# Altium PCB PCB1 (1).PcbDoc
Units mil, origin at the board's own origin, x right, y up, seen from the top; angles counter-clockwise.
Board outline 6000 x 4000 mil, 2 copper layers (Top Layer, Bottom Layer); 31 components, 20 nets, 81 pads, 0 vias.
Unrouted connection lines stored in the file: 59.
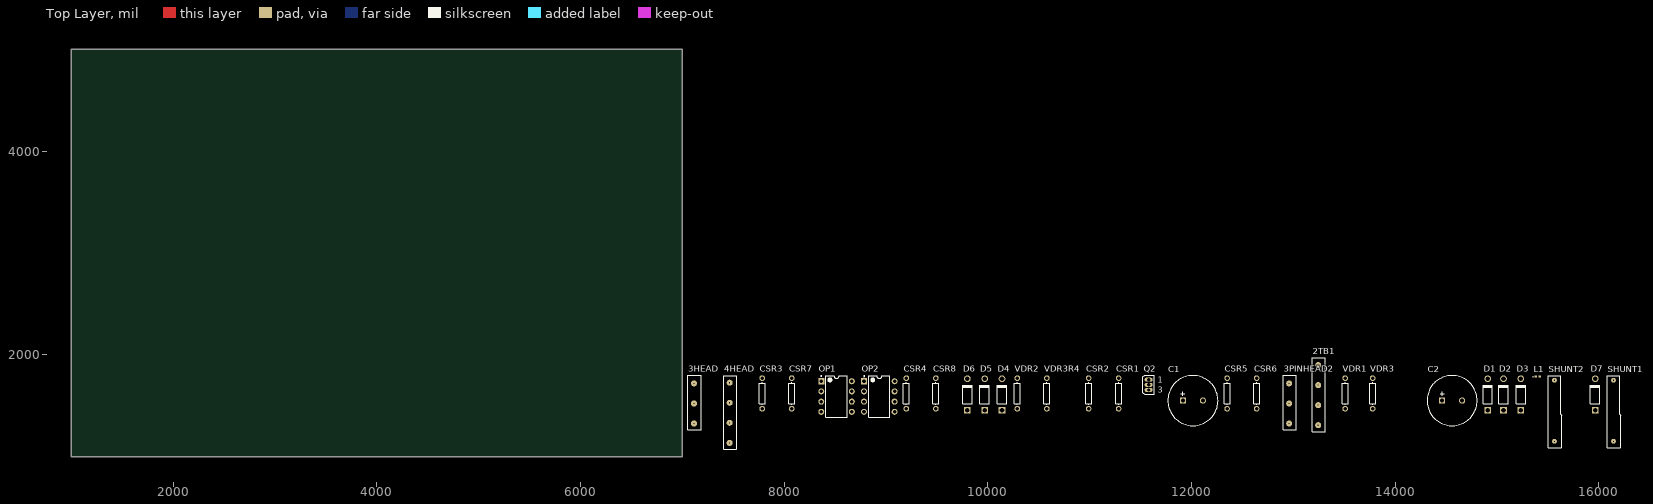
[diagram p0: Top Layer view]
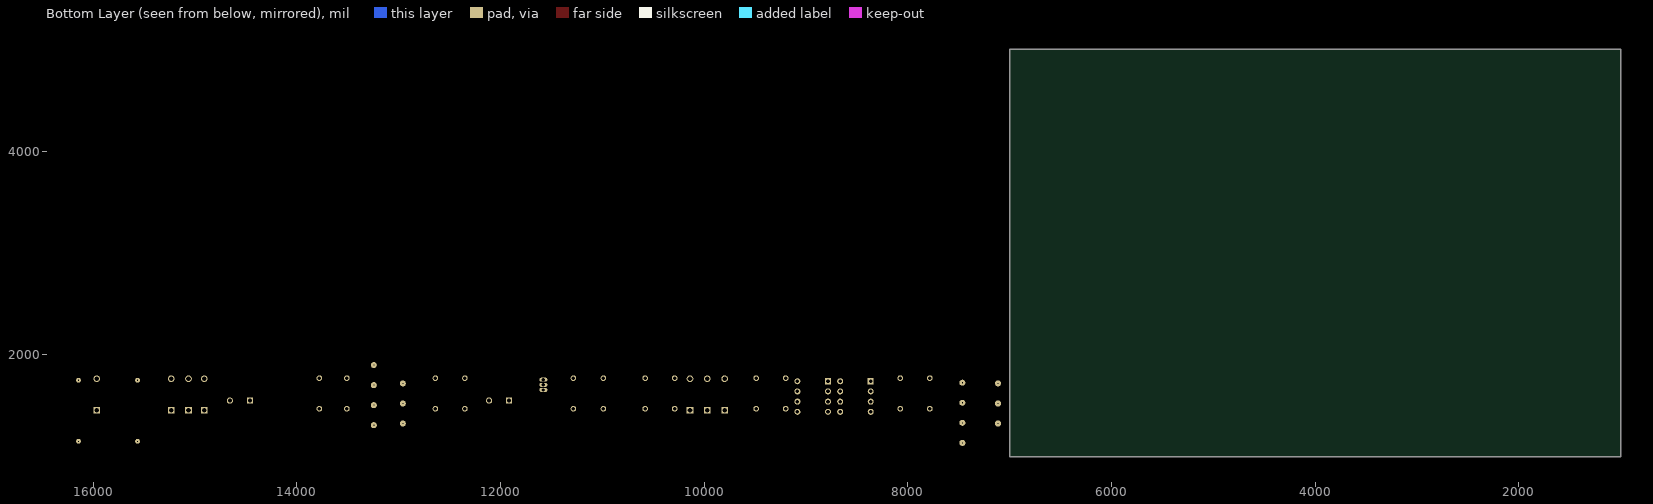
[diagram p1: Bottom Layer view, seen from below]

## Layer stack, top to bottom
Top Solder: solder mask 0.4, Solder Resist, Dk 3.5
Top Layer: signal copper 1.4
Dielectric 1: dielectric 12.6, FR-4, Dk 4.8
Bottom Layer: signal copper 1.4
Bottom Solder: solder mask 0.4, Solder Resist, Dk 3.5

## Board outline
1000,1000 7000,1000 7000,5000 1000,5000

## Design rules (kind name [scope] priority, off if disabled: settings)
Clearance [All] p1: gap=10 ignorepadtopadclearanceinfootprint=FALSE except(0: Arc-Hole Track-Hole SMDPad-Hole THPad-Hole Via-Hole Fill-Hole Poly-Hole Region-Hole Text-Hole)
PolygonConnect [All] p1: connectstyle=Relief reliefconductorwidth=10 reliefentries=4 polygonreliefangle="90 Angle" airgapwidth=10
RoomDefinition _1PCB_Shematic [InComponentClass('_1PCB_Shematic')] p1: confinementstyle=ConfineIn formatcopy=TRUE lockcomponents=FALSE outline 7045,1060 16430,1060 16430,1910 7045,1910
RoutingVias [All] p1: holewidth=28 width=50 viastyle="Through Hole" minholewidth=28 minwidth=50 maxholewidth=28 maxwidth=50
SolderMaskExpansion [All] p1: expansion=4
Width [All] p1: maxlimit=10 minlimit=10 preferedwidth=10
30 further rules are at their usual default settings.

## Components (designator, comment, footprint, x,y, rotation, side; value= is the part's Value field where it differs from the comment)
2TB1 "2PINTERMINAL" "4 PIN HEADER" 13245,1308.15 r90 top
3HEAD "3 PIN HEADER" "3 PIN HEADER" 7115,1325 r90 top
3PINHEAD2 "3 PIN HEADER" "3 PIN HEADER" 12960,1325 r90 top
4HEAD "4 PIN HEADER" "4 PIN HEADER" 7465,1135 r90 top
C1 "200uF" NIC-UHE-12.5x31.5-2_V 12015,1550 r0 top
C2 "GENERIC 100uF" NIC-UHE-12.5x31.5-2_V 14560,1550 r0 top
CSR1 "CSR_R1" AXIAL-0.3 11285,1620 r90 top value=1k
CSR2 "CSR_R1" AXIAL-0.3 10990,1620 r90 top value=1k
CSR3 "CSR_R2" AXIAL-0.3 7785,1620 r90 top value=100k
CSR4 "CSR_R2" AXIAL-0.3 9200,1620 r90 top value=100k
CSR5 "CSR_R1" AXIAL-0.3 12350,1620 r90 top value=1k
CSR6 "CSR_R1" AXIAL-0.3 12640,1620 r90 top value=1k
CSR7 "CSR_R2" AXIAL-0.3 8075,1620 r90 top value=100k
CSR8 "CSR_R2" AXIAL-0.3 9490,1620 r90 top value=100k
D1 "1N5817-T" DIOD-DO-41-P-2 14910,1610 r90 top
D2 "1N5817-T" DIOD-DO-41-P-2 15065,1610 r90 top
D3 "1N5817-T" DIOD-DO-41-P-2 15235,1610 r90 top
D4 "1N5817-T" DIOD-DO-41-P-2 10140,1610 r90 top
D5 "1N5817-T" DIOD-DO-41-P-2 9970,1610 r90 top
D6 "1N5817-T" DIOD-DO-41-P-2 9800,1610 r90 top
D7 "1N5817-T" DIOD-DO-41-P-2 15965,1610 r90 top
L1 "" 0402-A 15400,1785 r0 top value=1mH
OP1 "LM358AN" N08E 8515,1590 r0 top
OP2 "LM358AN" N08E 8935,1590 r0 top
Q2 "MOSFET-N" E3 11580,1705 r0 top
SHUNT1 "SH. RESISTOR" SHUNT15.24 16145,1150 r90 top
SHUNT2 "SH. RESISTOR" SHUNT15.24 15565,1150 r90 top
VDR1 "V_DIVA1" AXIAL-0.3 13510,1620 r90 top value=200k
VDR2 "V_DIVB2" AXIAL-0.3 10290,1620 r90 top value=100k
VDR3 "V_DIVA2" AXIAL-0.3 13780,1620 r90 top value=200k
VDR3R4 "V_DIVB2" AXIAL-0.3 10580,1620 r90 top value=100k

## Footprints (in the part's own frame and the unit in brackets; to place one, negate y for a bottom-side part, rotate by r counter-clockwise, add the part's x,y. Pads: shape width x height; smd on the part's side, far side on the other; paste and mask are expansions set on the pad)
"3 PIN HEADER" [mm] "3 PIN HEADER"
  round 1.5 hole 0.15: 1(0,0) 2(5,0) 3(10,0)
  silkscreen extent -1.6,-1.8 12,1.5
"4 PIN HEADER" [mm] "4 PIN HEADER"
  round 1.5 hole 0.15: 1(0,0) 2(5,0) 3(10,0) 4(15,0)
  silkscreen extent -1.6,-1.8 16.8,1.5
0402-A [mm] "Chip Inductor, Body 1.0x0.5mm, IPC High Density"
  rect 0.6x0.5 smd: 1(-0.5,0) 2(0.5,0)
  silkscreen extent -1.1,-0.15 -1.1,0.15, body extent -0.55,-0.3 0.55,0.3, height 0.55
AXIAL-0.3 [mm] "Axial Device, Thru-Hole; 2 Leads; 0.3 in Pin Spacing"
  round 1.4 hole 0.85: 1(-3.81,0) 2(3.81,0)
  silkscreen extent -2.77,-0.76 2.77,0.76
DIOD-DO-41-P-2 [mm] "THD, 2-Leads, Body 4.635x2.36mm, Pin Spacing 7.85mm"
  rect 1.65x1.65 hole 1.15: 1(-3.925,0)
  round 1.65 hole 1.15: 2(3.925,0)
  silkscreen extent -2.32,-1.18 2.32,1.18, body extent -4.36,-1.18 4.36,1.18, height 2.35
E3 [mm] "TO, Flat Index; 3 In-Line, Axial Leads; Body Dia. 4.6mm; Lead Dia. 0.5 mm (max)"
  oval 2x1 hole 0.8: 1(0,1.27) 2(0,0) 3(0,-1.27)
  silkscreen extent -1.41,-2.41 1.41,2.41
N08E [mm] "DIP, 8-Pin, Row Spacing 7.62 mm, Pitch 2.54 mm"
  rect 1.5x1.5 hole 0.9: 1(-3.81,3.81)
  round 1.5 hole 0.9: 2(-3.81,1.27) 3(-3.81,-1.27) 4(-3.81,-3.81) 5(3.81,-3.81) 6(3.81,-1.27) 7(3.81,1.27) 8(3.81,3.81)
  silkscreen extent -3.93,-5.15 2.65,5.23, body extent -3.6,-5.15 3.6,5.15, height 5.33
NIC-UHE-12.5x31.5-2_V [mm] "THD, 2-Leads, Dia 12.5mm, Body Length 31.5mm, Pin Spacing 5mm"
  rect 1.55x1.55 hole 1.05: 1(-2.5,0)
  round 1.55 hole 1.05: 2(2.5,0)
  silkscreen extent -6.25,-6.25 6.25,6.25, body extent -6.25,-6.25 6.25,6.25, height 33.5
SHUNT15.24 [mm] "SHUNT RESISTER 15.24"
  round 1.2 hole 0.15: 1(0,0) 2(15.24,0)
  silkscreen extent -1.6,-1.8 16.4,1.5

## Part data
2TB1: library part 2TB?
3HEAD 3PINHEAD2: library part 3HEAD?
4HEAD: library part 4HEAD?
C1 C2: library part CMP-1253-00001-1, Capacitance Tolerance=+/-20%, Manufacturer=Nichicon, PartNumber=UHE1H681MHD, Rated Capacitance="680 uF", Rated Voltage="50 V", Temperature Range="-40 to 105 degC", ComponentLink1Description="Manufacturer URL", ComponentLink1URL=http://www.nichicon.co.jp/, ComponentLink2Description=Datasheet, ComponentLink2URL=http://nichicon-us.com/english/products/pdfs/e-he.pdf, ComponentLink3Description="Package Specification", ComponentLink3URL=http://nichicon-us.com/english/products/pdfs/e-he.pdf, DatasheetVersion=Sep-13, Mounting Technology="Through Hole", PackageDescription="2-Pin Through Hole Device, Dia 12.5 mm, Body Length 31.5 mm, Pin Spacing 5 mm", Packing=Bulk, Rated Ripple="2310 mA", RoHS=TRUE
CSR1 CSR2 CSR3 CSR4 CSR5 CSR6 CSR7 CSR8 VDR1 VDR2 VDR3 VDR3R4: library part Res1, "Resistor", LatestRevisionDate=17-Jul-2002, LatestRevisionNote="Re-released for DXP Platform.", PackageDescription="Axial Device, Thru-Hole; 2 Leads; 0.3 in Pin Spacing", PackageReference=AXIAL-0.3, Published=8-Jun-2000, Publisher="Altium Limited"
D1 D2 D3 D4 D5 D6 D7: library part CMP-2000-05521-1, "Schottky Barrier Rectifier, 1 A, 20 V, -65 to 125 degC, 2-Pin DO-41, RoHS, Tape and Reel", If - Forward Current=1A, Ifsm - Forward Surge Current=25A, Ir - Reverse Current=1000uA, Manufacturer=DiodesIncorporated, Maximum Operating Temperature=+125C, Minimum Operating Temperature=-65C, Operating Temperature Range=-65Cto+125C, Package / Case=DO-41, Package Description="2-Pin Through Hole Device, Body 4.635 x 2.36 mm, Pin Spacing 7.85 mm", Package Reference=DO-41-P-2, Vf - Forward Voltage=0.75Vat3A, Vrrm - Repetitive Reverse Voltage=20V, Brand=DiodesIncorporated, Configuration=Single, Datasheet URL=http://www.diodes.com/_files/datasheets/ds23001.pdf, Datasheet Version="Rev. 8-2, 05/2009", Factory Pack Quantity=5000, Height=2.72mm, Length=5.21mm, Manufacturer URL=http://www.diodes.com/, Mounting Style=ThroughHole, Mounting Technology=ThroughHole, Packaging=Reel, Product=SchottkyRectifiers, Product Category=SchottkyDiodes&Rectifiers, RoHS=True, Series=1N58, Technology=Si, Termination Style=ThroughHole, Type=SchottkyDiode, Unit Weight=0.010582oz, Width=2.72mm
L1: library part Inductor, "Inductor", Case/Package=Radial, Current Rating=760mA, DC Resistance (DCR)=221mR, Inductance=1mh, Inductance Tolerance=15%, Manufacturer=Murata, Manufacturer Part Number=33102C, Max Operating Temperature=125°C, Min Operating Temperature=-40°C, Package Quantity=40, Self Resonant Frequency=700kHz, Test Frequency=800kHz, Code_IEC=1005, Code_JEITA=0402, ComponentLink1Description=http://www.murata-ps.com/data/magnetics/kmp_3300.pdf?src-supplier=Digi-Key, ComponentLink1URL=http://www.murata-ps.com/data/magnetics/kmp_3300.pdf?src-supplier=Digi-Key, ComponentLink2Description=http://www.farnell.com/datasheets/1482175.pdf?src-supplier=Element14, ComponentLink2URL=http://www.farnell.com/datasheets/1482175.pdf?src-supplier=Element14, Contact Plating=Tin, Depth=16.8mm, Height=31mm, Height - Seated (Max)=1.22inch, LatestRevisionDate=29-May-2009, LatestRevisionNote="IPC-7351 Footprint Added.", Lead/Base Style=Pin, Lead Free="Lead Free", Lead Pitch=20.32mm, Length=1.14inch, Max DC Current=760mA, Mount="Through Hole", PackageDescription="Chip Inductor", PackageReference=0402-A, Packaging=Tray, Pricing 1="1 = 1.80700, 5 = 1.77000, 10 = 1.71500, 25 = 1.62990, 50 = 1.47600, 100 = 1.45100, 200 = 1.38900 (USD)", Published=8-Jun-2000, Publisher="Altium Limited", Q Factor=0.85, Radiation Hardening=No, REACH SVHC="No SVHC", RMS Current (Irms)=760mA, RoHS=Yes, Shielding=Unshielded, Stock 1=40, Supplier 1=Arrow, Supplier Part Number 1=33102C, Termination=Radial, Tolerance=15%, Width=16.3mm
OP1 OP2: library part CMP-0055-00164-2, "Low Power Dual Operational Amplifier, 8-pin MDIP", Manufacturer="National Semiconductor", PackageTopMarking=NSUZXYTTE#*LM*358AN, PowerWise=N, Code_JEDEC=MS-001-BA, ComponentLink1Description="LM358 Datasheet", ComponentLink1URL=http://www.national.com/ds/LM/LM358.pdf, ComponentLink2Description="LM358 Web Page", ComponentLink2URL=http://www.national.com/pf/LM/LM358.html, ComponentLink3Description="N08E Package Page", ComponentLink3URL=http://www.national.com/packaging/folders/n08e.html, CompType=Amplifiers, DatasheetVersion=Oct-2005, PackageDescription="MDIP, .365 x .250 x .130in, 8 Lead, .100in Pitch", PackageReference=N08E, PackageVersion="revG, May-2006", PinCount=8, RevisionNote="Component URLs added", RoHS=N
Q2: "N-Channel MOSFET", LatestRevisionDate=17-Jul-2002, LatestRevisionNote="Re-released for DXP Platform.", PackageDescription="TO, Flat Index; 3 In-Line, Axial Leads; Body Dia. 4.6mm; Lead Dia. 0.5 mm (max)", PackageReference=E3, PackageVersion=1995/1996, Published=8-Jun-2000, Publisher="Altium Limited"
SHUNT1 SHUNT2: library part SHUNTR?

## Nets (pads, with @x,y where several pads share a name; then routed paths per layer and width w, separated by ;. In a path a pad name is that pad's centre, name@x,y a point inside that pad or via, vN(x,y) a via of type N, cw(c..) or ccw(c..) an arc to the next point about the centre after c; other vN are vias at no path point)
"ARD 5V": 3HEAD.1 OP1.8 OP2.8
"ARD GND": 3HEAD.2 CSR3.2 CSR7.2 OP1.4 OP1.5 OP2.4 OP2.5
"CURRENT 1": 4HEAD.1 CSR4.2 OP1.1
"CURRENT 2": 4HEAD.3 CSR8.2 OP2.1
Net2TB1_1: 2TB1.1 C1.2 C2.2 D4.1 D5.1 D6.1 Q2.3 VDR2.2 VDR3R4.2
Net2TB1_2: 2TB1.2 CSR6.2 SHUNT1.2 VDR3.1
NetC1_1: C1.1 CSR5.2 D7.2 SHUNT1.1
NetC2_1: C2.1 CSR1.2 L1.1 SHUNT2.2 VDR1.1
NetCSR1_1: CSR1.1 CSR4.1 OP1.2
NetCSR2_1: CSR2.1 CSR3.1 OP1.3
NetCSR5_1: CSR5.1 CSR7.1 OP2.3
NetCSR6_1: CSR6.1 CSR8.1 OP2.2
NetD7_1: D7.1 L1.2 Q2.1
"PHASE 1": 3PINHEAD2.3 D1.1 D6.2
"PHASE 2": 3PINHEAD2.2 D2.1 D5.2
"PHASE 3": 3PINHEAD2.1 D3.1 D4.2
PWM: 3HEAD.3 Q2.2
Vdc: CSR2.2 D1.2 D2.2 D3.2 SHUNT2.1
"VOLTAGE 1": 4HEAD.2 OP1.6 OP1.7 VDR1.2 VDR2.1
"VOLTAGE 2": 4HEAD.4 OP2.6 OP2.7 VDR3.2 VDR3R4.1
pads on no net: 2TB1.3 2TB1.4

## Text inside footprints (layer, text, board x,y; h text height)
Q2: Top Overlay "1" at 11669.57,1726.85 h59.05; Top Overlay "3" at 11669.57,1627.72 h59.05